# Altium PCB touch_key_v0.1.PcbDoc
Units mil, origin at the board's own origin, x right, y up, seen from the top; angles counter-clockwise.
Board outline 2770.69 x 2770.7 mil, 2 copper layers (Top Layer, Bottom Layer); 60 components, 48 nets, 207 pads, 143 vias.
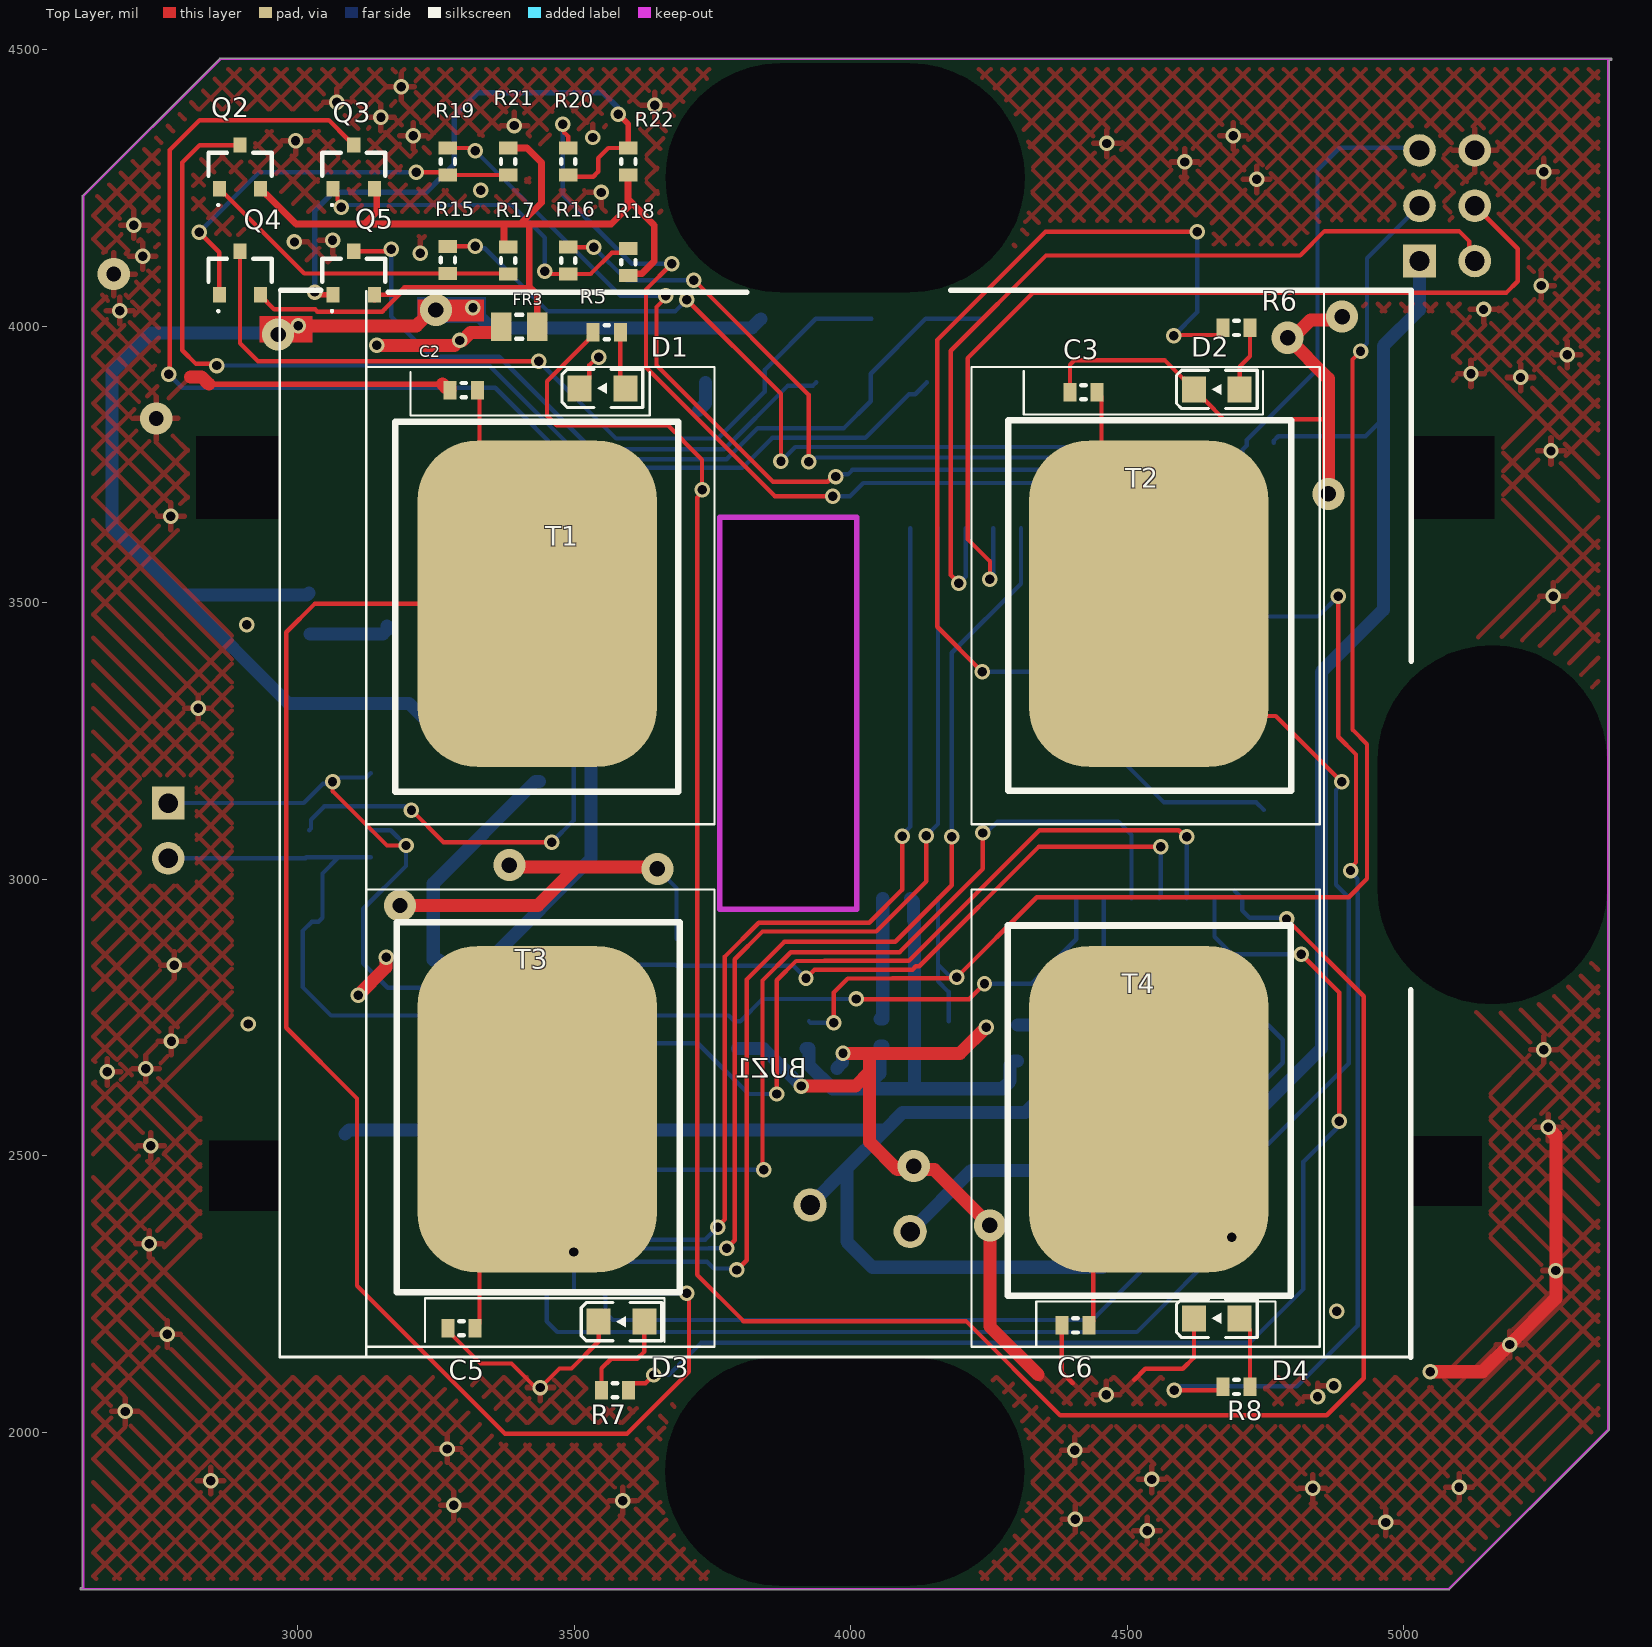
[diagram p0: Top Layer view]
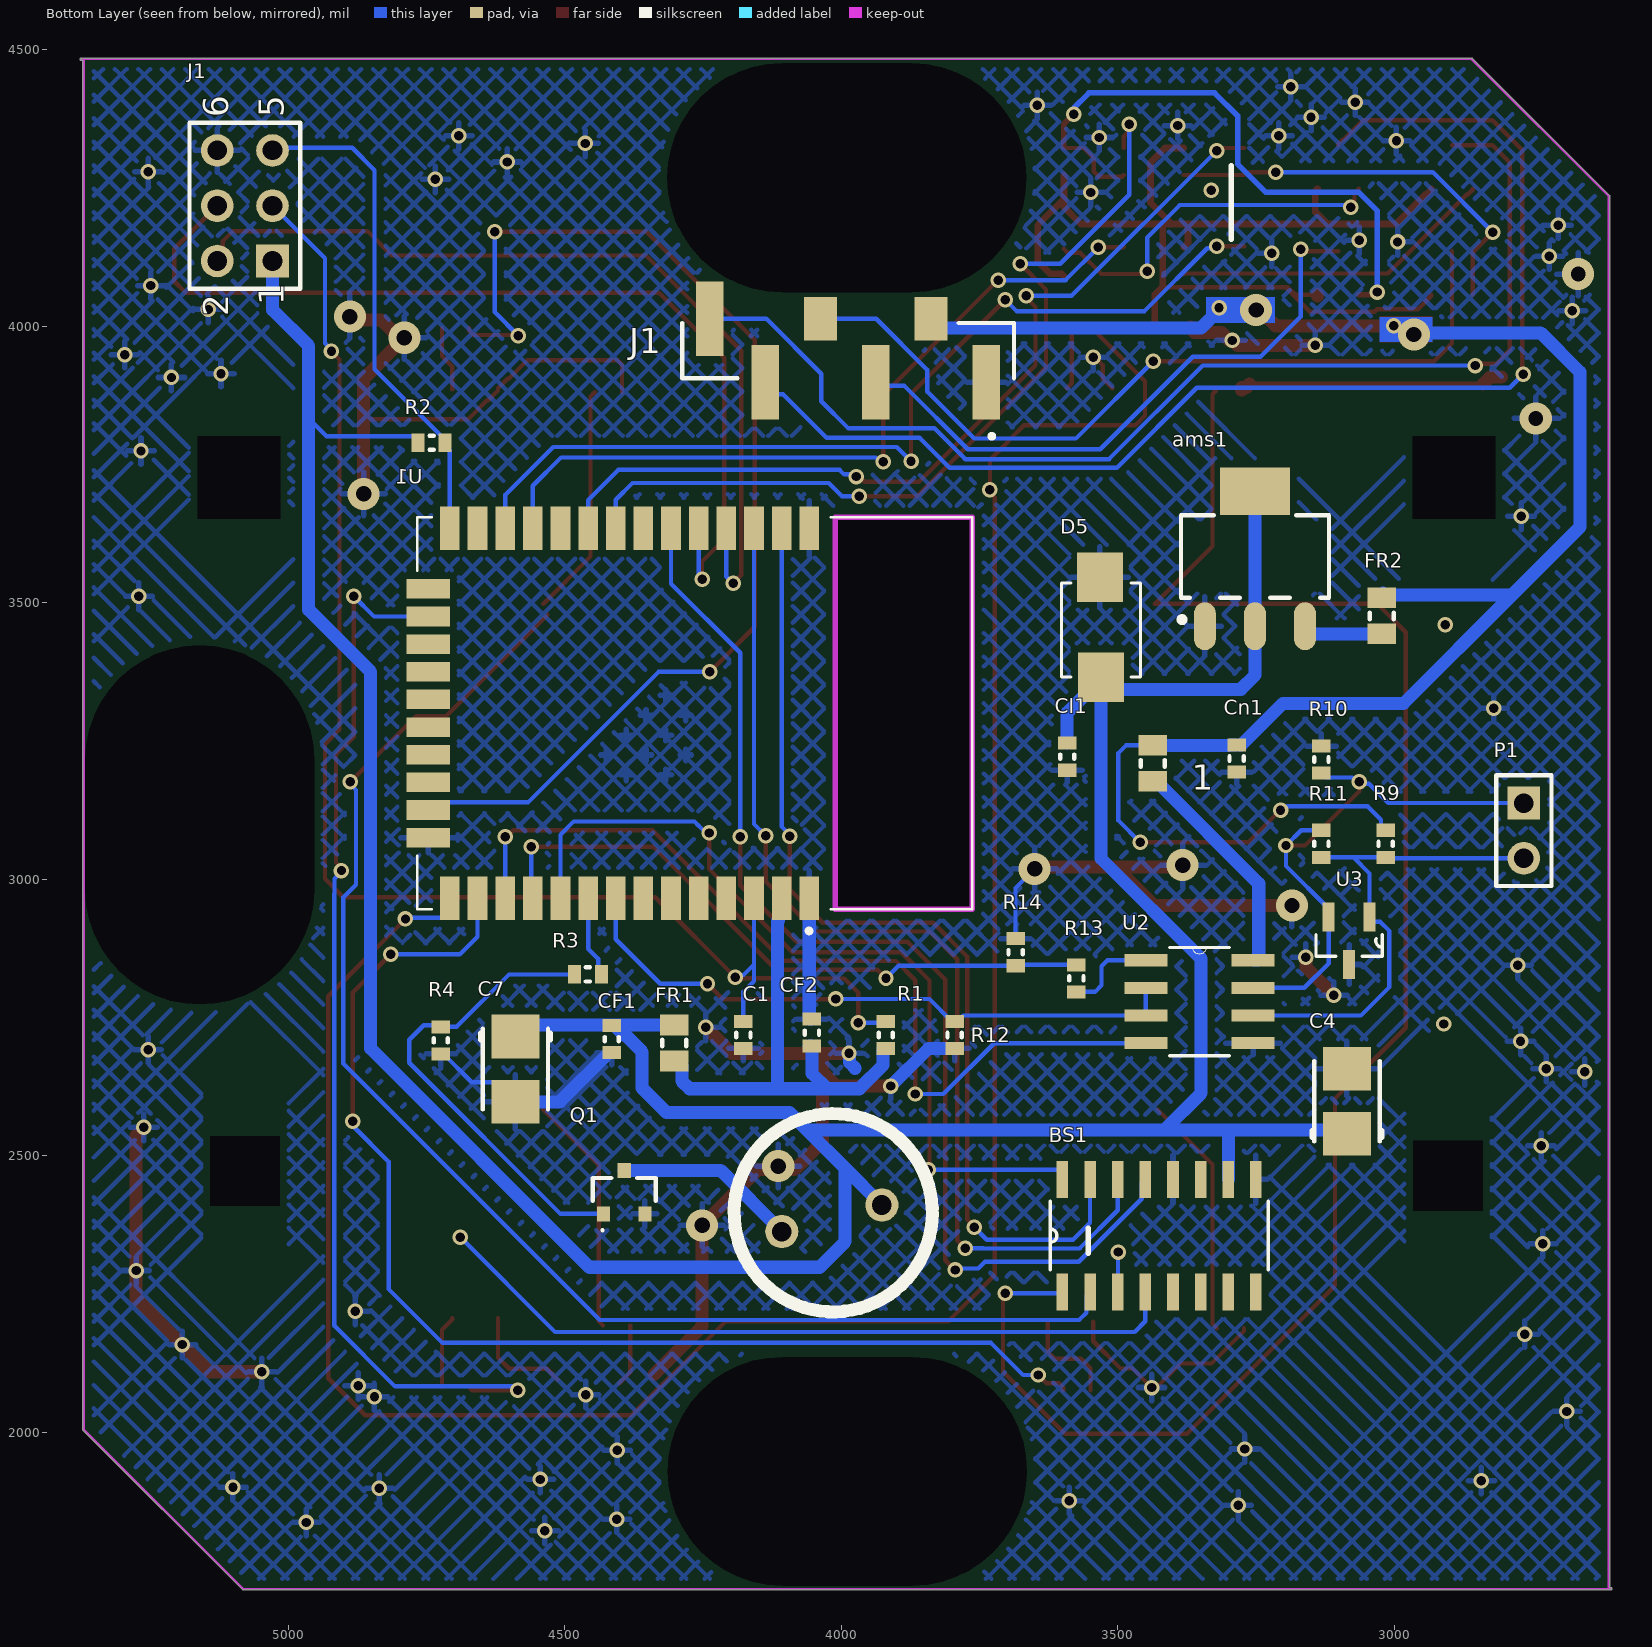
[diagram p1: Bottom Layer view, seen from below]
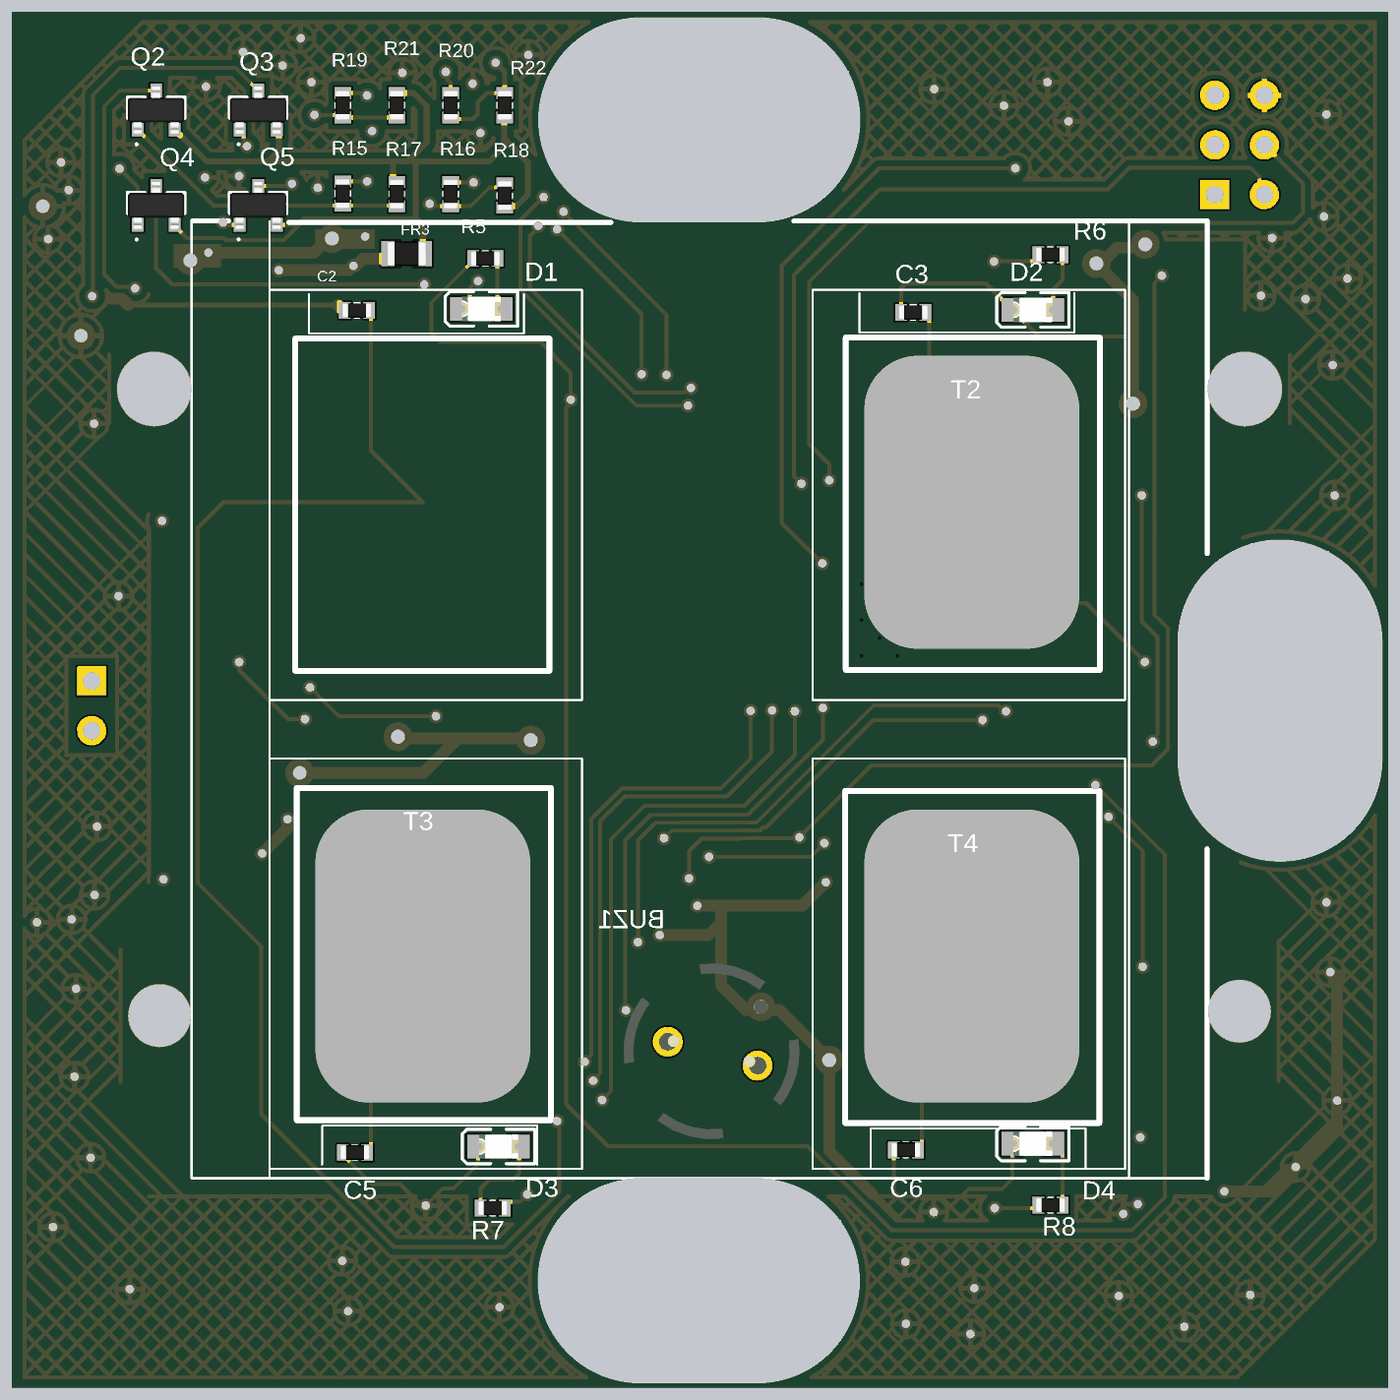
[diagram p2: 3D render of the assembled board from above, using the file's embedded part models]
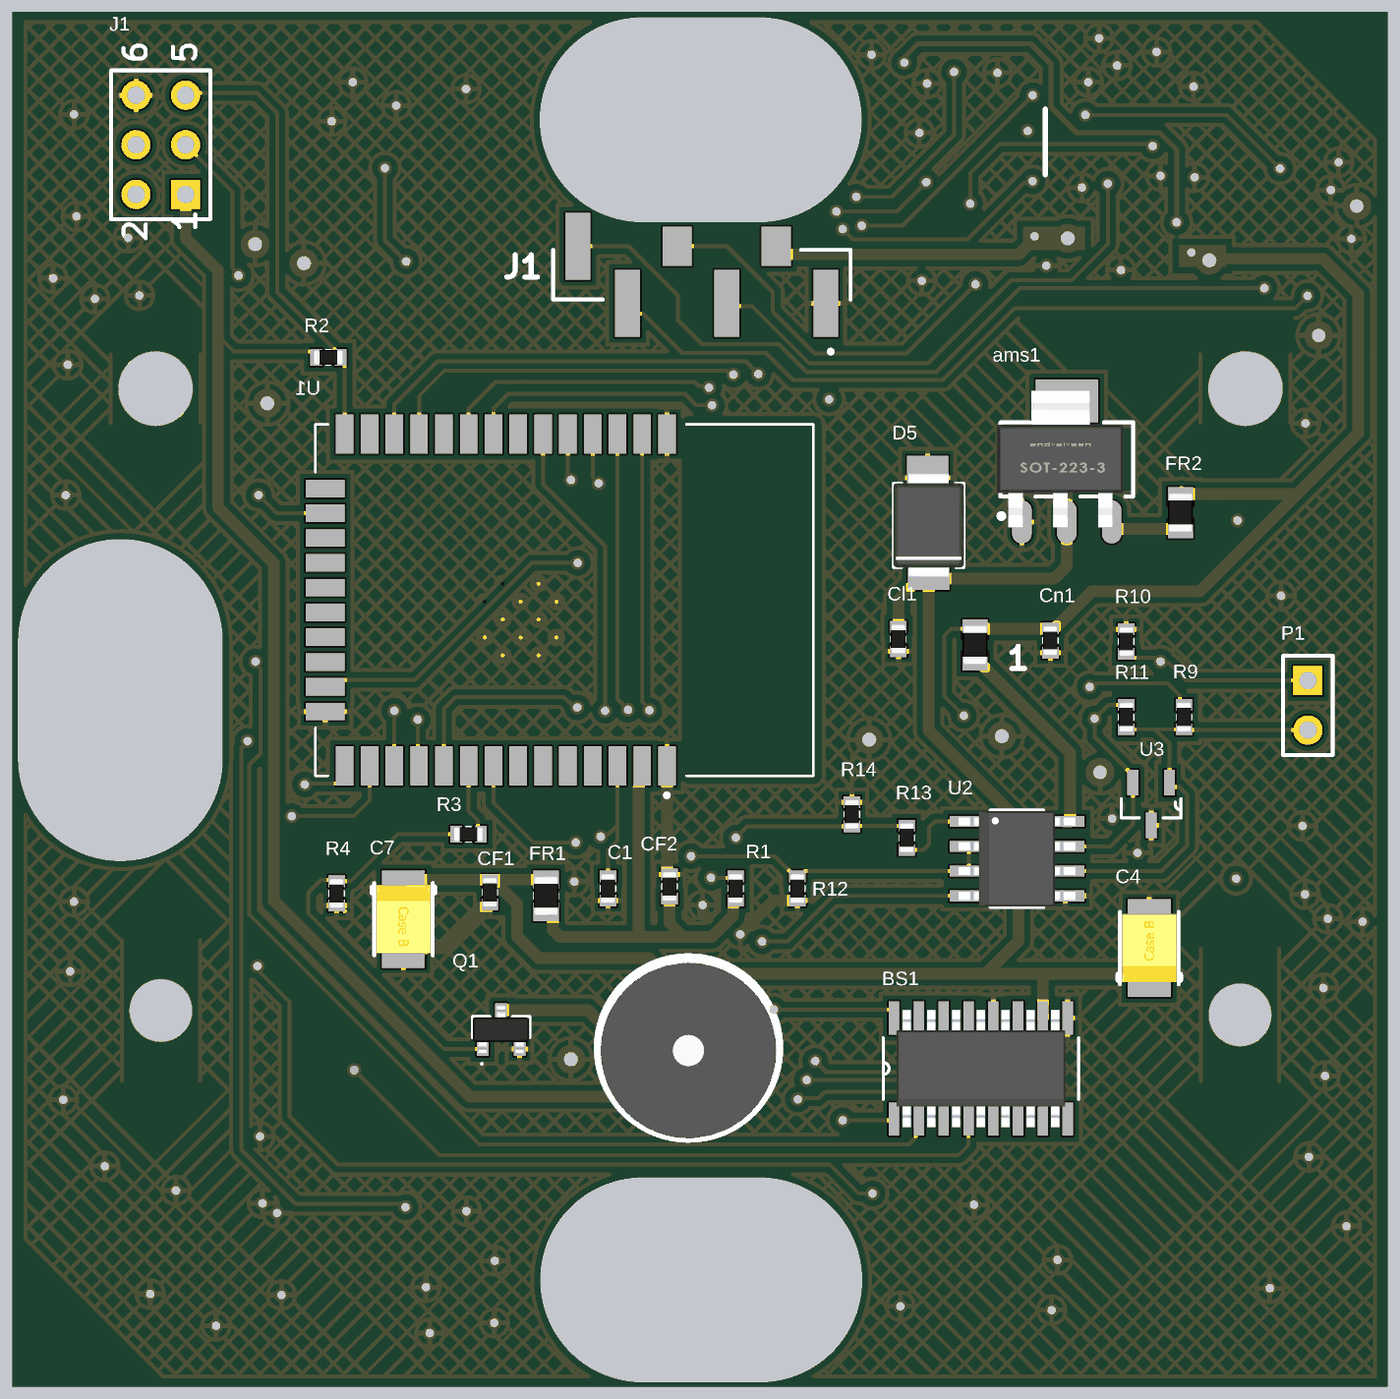
[diagram p3: 3D render of the assembled board from below, using the file's embedded part models]

## Layer stack, top to bottom
Top Solder: solder mask 0.4, Solder Resist, Dk 3.5
Top Layer: signal copper 1.4
Dielectric 1: dielectric 12.6, FR-4, Dk 4.8
Bottom Layer: signal copper 1.4
Bottom Solder: solder mask 0.4, Solder Resist, Dk 3.5

## Board outline
2608.27,1714.55 cw(c2608.27,1716.54) 2608.27,1718.52 2610.22,1718.52 2610.22,4235.24 cw(c2612.2,4235.24) 2610.81,4236.65 2610.8,4236.64 2858.83,4484.67 2858.82,4484.66 cw(c2860.24,4483.27) 2860.24,4485.25 5375,4485.25 cw(c5375,4483.27) 5376.98,4483.27 cw(c5375,4483.27) 5375,4481.28 5372.06,4481.28 5372.06,2004.92 cw(c5370.08,2004.92) 5371.47,2003.51 5371.48,2003.52 5083.1,1715.13 5083.11,1715.14 cw(c5081.69,1716.54) 5081.69,1714.55
cut-out: 4011.22,3654.53 3763.19,3654.53 3763.19,2945.87 4011.22,2945.87

## Design rules (kind name [scope] priority, off if disabled: settings)
Clearance [All] p1: gap=8 ignorepadtopadclearanceinfootprint=FALSE except(12: Arc-Poly Track-Poly SMDPad-Poly THPad-Poly Via-Poly Fill-Poly Poly-Poly)
PolygonConnect [All] p1: connectstyle=Relief reliefconductorwidth=10 reliefentries=4 polygonreliefangle="90 Angle" airgapwidth=10
RoomDefinition U_Touch_pad [InComponentClass('U_Touch_pad')] p1: confinementstyle=ConfineOut formatcopy=TRUE lockcomponents=FALSE outline 10984.25,4602.59 10384.36,4602.59 10384.36,5384.12 10984.25,5384.12
RoomDefinition U_RS485 [InComponentClass('U_RS485')] p2: confinementstyle=ConfineOut formatcopy=TRUE lockcomponents=FALSE outline 10397.64,4228.35 10707.07,4228.35 10707.07,4547.26 10397.64,4547.26
RoomDefinition U_Relay_baias [InComponentClass('U_Relay_baias')] p3: confinementstyle=ConfineOut formatcopy=TRUE lockcomponents=FALSE outline 10391.31,3450.79 10800.2,3450.79 10800.2,4190.98 10391.31,4190.98
RoomDefinition U_power [InComponentClass('U_power')] p4: confinementstyle=ConfineOut formatcopy=TRUE lockcomponents=FALSE outline 10205.63,2912.4 11004.92,2912.4 11004.92,3329.74 10205.63,3329.74
RoomDefinition U_MCU [InComponentClass('U_MCU')] p5: confinementstyle=ConfineOut formatcopy=TRUE lockcomponents=FALSE outline 11225.66,3417.32 12075.79,3417.32 12075.79,4573.88 11225.66,4573.88
RoutingVias [All] p1: holewidth=17 width=28 viastyle="Through Hole" minholewidth=17 minwidth=28 maxholewidth=28 maxwidth=50
SilkToSilkClearance [All] p1: silktosilkclearance=5
SolderMaskExpansion [All] p1: expansion=4 istentingtop=FALSE
Width [All] p1: maxlimit=23.62 minlimit=7.87 preferedwidth=10
29 further rules are at their usual default settings.

## Classes and differential pairs
net class Relay_[1..4]: Relay_1 Relay_2 Relay_3 Relay_4
net class LED_[1..4]: LED_1 LED_2 LED_3 LED_4
component class U_Touch_pad: BS1 C2 C3 C4 C5 C6 D1 D2 D3 D4 R5 R6 R7 R8 T1 T2 T3 T4
component class U_RS485: 1 Cn1 P1 R9 R10 R11 R12 R13 R14 U2 U3
component class U_Relay_baias: FR3 J1 Q2 Q3 Q4 Q5 R15 R16 R17 R18 R19 R20 R21 R22
component class U_power: ams1 C7 Cl1 D5 FR2
component class U_MCU: BUZ1 C1 CF1 CF2 FR1 J1 Q1 R1 R2 R3 R4 U1

## Components (designator, comment, footprint, x,y, rotation, side; value= is the part's Value field where it differs from the comment)
1 "F=1.0 A" SMD_RES_0805 3437.01,3177.17 r90 bottom
ams1 "3V3" SOT223 3251.97,3583.66 r90 bottom
BS1 "BS818-02" SOIC127P600X175-16N 3425.2,2355.32 r90 bottom
BUZ1 "Buzzer" Buzzer_japan 4015.75,2387.8 r0 top locked
C1 "1uF" "RES 0603 (1608X06L)" 4177.17,2693.9 r90 bottom
C2 "3pF" "RES 0603 (1608X06L)" 3275.81,3884.84 r0 top
C3 "3pF" "RES 0603 (1608X06L)" 4396.87,3880.91 r0 top
C4 "100uf 6vT" B 3085.63,2598.43 r90 bottom
C5 "3pF" "RES 0603 (1608X06L)" 3271.87,2187.99 r0 top
C6 "3pF" "RES 0603 (1608X06L)" 4382.11,2192.91 r0 top
C7 "100uf 6vT" B 4589.57,2656.5 r270 bottom
CF1 "Capacitor SMD" "RES 0603 (1608X06L)" 4415.35,2735.24 r270 bottom
CF2 "Capacitor SMD" "RES 0603 (1608X06L)" 4053.15,2698.06 r90 bottom
Cl1 "100nf" "RES 0603 (1608X06L)" 3591.54,3197.07 r90 bottom
Cn1 "100nF" "RES 0603 (1608X06L)" 3285.11,3193.9 r90 bottom
D1 "LED SMD PACKAGE" LED_SMD_0805 3551.18,3887.8 r0 top
D2 "LED SMD PACKAGE" LED_SMD_0805 4662.4,3885.83 r0 top
D3 "LED SMD PACKAGE" LED_SMD_0805 3585.63,2199.8 r0 top
D4 "LED SMD PACKAGE" LED_SMD_0805 4662.4,2205.71 r0 top
D5 "SMBJ3.3" DIOM4336X265N 3530.51,3450.79 r90 bottom
FR1 "Ferrit Bead" "RES 0805 (2012X06L)" 4302.15,2736.22 r270 bottom
FR2 "Ferrit Bead" "RES 0805 (2012X06L)" 3022.64,3508.86 r270 bottom
FR3 "Ferrit Bead" "RES 0805 (2012X06L)" 3368.11,3999.02 r0 top
J1 "TSM-106-01-TM-SV" SAMTEC_TSM-106-01-TM-SV 3987.8,3956.1 r180 bottom
J1 "Header 3X2" HDR2X3 5028.94,4118.11 r90 bottom (schematic designator j1)
P1 "Header 2" HDR1X2 2765.75,3137.8 r270 bottom
Q1 "BC817-25" BC81725215 4392.72,2434.06 r180 bottom
Q2 "BC817-25" BC81725215 2895.67,4288.39 r0 top
Q3 "BC817-25" BC81725215 3101.38,4288.39 r0 top
Q4 "BC817-25" BC81725215 2895.67,4096.46 r0 top
Q5 "BC817-25" BC81725215 3101.38,4096.46 r0 top
R1 "10K" "RES 0603 (1608X06L)" 3919.78,2742.89 r270 bottom
R2 "10K" "RES 0603 (1608X06L)" 4765.53,3789.37 r180 bottom
R3 "10K" "RES 0603 (1608X06L)" 4434.06,2827.76 r0 bottom
R4 "10K" "RES 0603 (1608X06L)" 4724.41,2733.05 r270 bottom
R5 "1k" "RES 0603 (1608X06L)" 3534.45,3989.17 r0 top
R6 "1k" "RES 0603 (1608X06L)" 4673.45,3997.05 r0 top
R7 "1k" "RES 0603 (1608X06L)" 3598.43,2075.79 r180 top
R8 "1k" "RES 0603 (1608X06L)" 4673.45,2081.69 r0 top
R9 "375" "RES 0603 (1608X06L)" 3015.75,3088.58 r270 bottom
R10 "375" "RES 0603 (1608X06L)" 3131.89,3240.92 r270 bottom
R11 "50 ohm" "RES 0603 (1608X06L)" 3131.89,3039.59 r90 bottom
R12 "10K" "RES 0603 (1608X06L)" 3795.28,2742.89 r270 bottom
R13 "5.6k" "RES 0603 (1608X06L)" 3574.8,2796.26 r90 bottom
R14 "10k" "RES 0603 (1608X06L)" 3685.04,2843.5 r90 bottom
R15 "10K" "RES 0603 (1608X06L)" 3271.65,4144.46 r270 top
R16 "10K" "RES 0603 (1608X06L)" 3489.26,4143.7 r270 top
R17 "10K" "RES 0603 (1608X06L)" 3380.46,4094.49 r90 top
R18 "10K" "RES 0603 (1608X06L)" 3598.06,4140.55 r270 top
R19 "10K" "RES 0603 (1608X06L)" 3271.65,4322.64 r270 top
R20 "10K" "RES 0603 (1608X06L)" 3489.26,4322.64 r270 top
R21 "10K" "RES 0603 (1608X06L)" 3380.46,4273.65 r90 top
R22 "10K" "RES 0603 (1608X06L)" 3598.06,4322.64 r270 top
T1 "touch key" Touch_key#1 1522.64,3686.02 r0 top
T2 "touch key" Touch_key#2 4539.37,3498.03 r180 top
T3 "touch key" Touch_key#2 3433.07,2583.66 r180 top
T4 "touch key" Touch_key#2 4539.37,2583.66 r0 top
U1 "ESP32-WROOM-32" MODULE_ESP32-WROOM-32 4265.16,3300.2 r90 bottom locked
U2 "ADM485JRZ" SOIC127P600X175-8N 3352.36,2778.54 r180 bottom
U3 "SM712" SOT95P237X112-3N 3081.69,2888.78 r270 bottom

## Footprints (in the part's own frame and the unit in brackets; to place one, negate y for a bottom-side part, rotate by r counter-clockwise, add the part's x,y. Pads: shape width x height; smd on the part's side, far side on the other; paste and mask are expansions set on the pad)
B [mm]
  rect 2x2.2 smd: 1(-1.5,0) 2(1.5,0)
  silkscreen extent -1.85,-1.6 1.85,1.6, body extent -1.75,-1.4 1.75,1.4, height 1.9
BC81725215 [mm]
  rect 0.6x0.7 smd: 1(-0.95,-1) 2(0.95,-1) 3(0,1)
  silkscreen extent -1.45,-1.8 1.45,0.65, body extent -1.45,-1.2 1.45,1.2, height 0.95
Buzzer_japan [mil]
  round 60 hole 35.43: 1(-89,23) 2(92,-25)
  body extent -218,-213 216,221, height 177
DIOM4336X265N [mm]
  rect 2.28x2.12 smd: A(2.425,0.05) C(-2.165,0)
  silkscreen extent -2.16,-1.81 2.16,1.81, body extent -2.68,-1.81 2.68,1.81, height 2.65
HDR1X2 [mm] "Connector; Header; 2 Position"
  rect 1.5x1.5 hole 0.9: 1(0,0)
  round 1.5 hole 0.9: 2(2.54,0)
  silkscreen extent -1.27,-1.27 3.81,1.27
HDR2X3 [mm] "Connector; Header; 3x2 Position"
  rect 1.5x1.5 hole 0.9: 1(0,0)
  round 1.5 hole 0.9: 2(0,2.54) 3(2.54,0) 4(2.54,2.54) 5(5.08,0) 6(5.08,2.54)
  silkscreen extent -1.27,-1.27 6.35,3.81
LED_SMD_0805 [mm]
  rect 1.1x1.2 smd: 1(-1.05,0) 2(1.05,0)
  silkscreen extent -1.85,-0.88 1.85,0.88, body extent -1,-0.62 1,0.63, height 0.7
MODULE_ESP32-WROOM-32 [mm]
  rect 2x0.9 smd: 1(-8.5,-5.26) 2(-8.5,-3.99) 3(-8.5,-2.72) 4(-8.5,-1.45) 5(-8.5,-0.18) 6(-8.5,1.09) 7(-8.5,2.36) 8(-8.5,3.63) 9(-8.5,4.9) 10(-8.5,6.17) 11(-8.5,7.44) 12(-8.5,8.71) 13(-8.5,9.98) 14(-8.5,11.25) 25(8.5,11.25) 26(8.5,9.98) 27(8.5,8.71) 28(8.5,7.44) 29(8.5,6.17) 30(8.5,4.9) 31(8.5,3.63) 32(8.5,2.36) 33(8.5,1.09) 34(8.5,-0.18) 35(8.5,-1.45) 36(8.5,-2.72) 37(8.5,-3.99) 38(8.5,-5.26)
  rect 0.9x2 smd: 15(-5.715,12.25) 16(-4.445,12.25) 17(-3.175,12.25) 18(-1.905,12.25) 19(-0.635,12.25) 20(0.635,12.25) 21(1.905,12.25) 22(3.175,12.25) 23(4.445,12.25) 24(5.715,12.25)
  round 0 all layers, no hole: 39_10(-1.917,0.405) 39_11(-0.082,0.405) 39_12(-2.835,1.322) 39_13(-1,1.322) 39_14(0.835,1.322) 39_15(-1.917,2.24) 39_16(-0.082,2.24) 39_17(-2.835,3.157) 39_18(-1,3.157) 39_19(0.835,3.157) 39_20(-1.917,4.075) 39_21(-0.082,4.075)
  Keep-Out Layer region: 9,-6.45 -9,-6.45 -9,-12.75 9,-12.75
  Keep-Out Layer region: 9,-6.45 -9,-6.45 -9,-12.75 9,-12.75
  silkscreen extent -10.1,-12.75 9,12.75
"RES 0603 (1608X06L)" [mm] "Chip Resistor, 2-Leads, Body 1.6x0.8mm, IPC High Density _ (0.063W)"
  rect 0.6x0.85 smd: 1(0,0) 2(1.244,0)
  silkscreen extent 0.52,-0.33 0.72,0.33, body extent -0.14,-0.38 1.38,0.38, height 0.45
"RES 0805 (2012X06L)" [mm] "Chip Resistor, 2-Leads, Body 2.0x1.3mm, IPC High Density _ (0.100 W)"
  rect 0.95x1.3 smd: 1(0,0) 2(1.65,0)
  silkscreen extent 0.67,-0.55 0.97,0.55, body extent -0.19,-0.63 1.84,0.64, height 0.6
SAMTEC_TSM-106-01-TM-SV [mm]
  rect 1.27x3.43 smd: 01(6.35,-1.46) 03(1.27,-1.46) 05(-3.81,-1.46) 06(-6.35,1.46)
  rect 1.5x2 smd: 02(3.81,1.46) 04(-1.27,1.46)
  silkscreen extent -7.62,-4.03 7.62,1.27
SMD_RES_0805 [mm] "Chip Resistor, 2-Leads, Body 2.0x1.3mm, IPC High Density _ (0.100 W)"
  rect 0.95x1.3 smd: 1(0,0) 2(1.65,0)
  silkscreen extent 0.67,-0.55 0.97,0.55, body extent -0.19,-0.63 1.84,0.64, height 0.6
SOIC127P600X175-8N [mil]
  rect 78x22 smd: 1(-97,75) 2(-97,25) 3(-97,-25) 4(-97,-75) 5(97,-75) 6(97,-25) 7(97,25) 8(97,75)
  silkscreen extent -54,-98 54,98, body extent -118,-96 118,96, height 69
SOIC127P600X175-16N [mil]
  rect 67x21 smd: 1(-102,175) 2(-102,125) 3(-102,75) 4(-102,25) 5(-102,-25) 6(-102,-75) 7(-102,-125) 8(-102,-175) 9(102,-175) 10(102,-125) 11(102,-75) 12(102,-25) 13(102,25) 14(102,75) 15(102,125) 16(102,175)
  silkscreen extent -62,-197 62,197, body extent -118,-170 118,170, height 69
SOT95P237X112-3N [mil]
  rect 52x22 smd: 1(-43,37) 2(-43,-37) 3(43,0)
  silkscreen extent -11,-60 28,60
SOT223 [mm]
  oval 2.2x1 smd: 1(-3.2,2.3) 2(-3.2,0) 3(-3.2,-2.3)
  rect 2.2x3.2 smd: 4(3,0)
  Top Layer pour cut-out: -1.7,3.556 1.7,3.556 1.7,-3.556 -1.7,-3.556
  silkscreen extent -3.02,-3.4 1.9,3.48, body extent -3.47,-2.93 3.53,3.58, height 1.7
Touch_key#1 [mm]
  rrect50% 11x15 smd mask+0.102: 1(48.525,-4.775)
Touch_key#2 [mm]
  rrect50% 11x15 smd mask+0.102: 1(0,0)

## Part data
1: library part "Fuse SMD1206", "SMD Fuses 1206", Data=16-12-2016, Desc.="SMD Fuses 1206", Designer="Abbas Basereh"
ams1: library part AMS1117-x.x, "x.x Volt, 800mA Low-Dropout Linear Regulator, 4-pin SOT-223", Data=16-12-2016, Designer="Ali Hafizi"
BS1: library part Component_1
BUZ1: library part Buzzer.., "Buzzer/dip/12v", LatestRevisionDate=17-Jul-2002, LatestRevisionNote="Re-released for DXP Platform.", Publisher="Altium Limited"
C1 C2 C3 C5 C6: library part CAP, "Capacitor"
C4 C7: library part T494B, "Cap/Tantalum/SMD/B", PackageDocument=Mar-2001, Code_JEITA=3528-21, ComponentLink1Description="Manufacturer Link", ComponentLink1URL=http://www.kemet.com/, ComponentLink2Description=Datasheet, ComponentLink2URL=http://www.kemet.com/kemet/web/homepage/kechome.nsf/vapubfilesname/F3102TA.pdf/$file/F3102TA.pdf, DatasheetDocument=Mar-2001, LatestRevisionDate=19-Mar-2004, LatestRevisionNote="Silkscreen dimensions re-sized.", PackageReference=B, Published=17-Jul-2002, Publisher="Altium Limited"
Cl1: library part "CAP SMD 0805", "CAP 0805", Data=16-12-2016, Desc.="CAP SMD 0805", Designer="Abbas Basereh"
Cn1: library part "CAP SMD PACKAGE", "TOTAL CAPACITOR SMD PACK", Data=2017-3-10, Desc.="CAP SMD TOTAL PACKAGES", Designer="Abbas Basereh"
D1 D2 D3 D4: "SMD Mono-color Chip LED Waterclear", Forward Voltage="3.2 V", Part Number=150080BS75000, Peak Wavelength="465 nm", Published Date="Jan 2017", Publisher="Ali Hafizi"
D5: library part SMBJ33, Package=None, Availability=Unavailable, MF="{'manufacturer': u'Taiwan Semiconductor'}", MP=SMBJ33, PRICE=None
J1: "CONN HEADER SMD 6POS 2.54MM", Package=None, Availability=Bad, Check_prices=https://www.snapeda.com/parts/TSM-106-01-TM-SV/Samtec/view-part/3383178/?ref=eda, MF=Samtec, MP=TSM-106-01-TM-SV, PRICE=None, Purchase-URL=https://pricing.snapeda.com/search/part/TSM-106-01-TM-SV/?ref=eda, SnapEDA_Link=https://www.snapeda.com/parts/TSM-106-01-TM-SV/Samtec/view-part/3383178/?ref=snap
J1: "Header, 3-Pin, Dual row", LatestRevisionDate=17-Jul-2002, LatestRevisionNote="Re-released for DXP Platform.", Publisher="Altium Limited"
P1: "Header, 2-Pin", LatestRevisionDate=17-Jul-2002, LatestRevisionNote="Re-released for DXP Platform.", Publisher="Altium Limited"
Q1 Q2 Q3 Q4 Q5: "Transistor BJT NPN", Manufacturer_Name=Nexperia, Mouser Part Number=N/A, Datasheet Link=https://assets.nexperia.com/documents/data-sheet/BC817_BC817W_BC337.pdf, Height=1.1mm, Manufacturer_Part_Number=BC817-25, Mouser Price/Stock=https://www.mouser.com/Search/Refine.aspx?Keyword=N%2FA
R1 R2 R5 R6 R7 R8: library part Res1, "Resistor", LatestRevisionDate=17-Jul-2002, LatestRevisionNote="Re-released for DXP Platform.", PackageReference=AXIAL-0.3, Published=8-Jun-2000, Publisher="Altium Limited"
R3 R4 R15 R16 R17 R18 R19 R20 R21 R22: library part Resistor, "Resistor", Power="1/8 W", Tolerance=5%
R9 R10 R11 R12 R13 R14: library part "RES 0805 0.125W", "RES 0805", Data=16-12-2016, Desc.="RES SMD 0805", Designer="Abbas Basereh"
U1: "Bluetooth, WiFi Transceiver Module 2.4GHz ~ 2.5GHz Surface Mount", Package="Module Espressif Systems", Digi-Key_Part_Number=1904-1010-1-ND, Digi-Key_Purchase_URL=https://www.digikey.com/product-detail/en/espressif-systems/ESP32-WROOM-32/1904-1010-1-ND/8544305?utm_source=snapeda&utm_medium=aggregator&utm_campaign=symbol, MF="Espressif Systems", MP=ESP32-WROOM-32, SnapEDA_Link=https://www.snapeda.com/parts/ESP32-WROOM-32/Espressif%20Systems/view-part/2753322/?ref=snap
U2: "EIA RS-485 Transceiver", Package=None, Availability=Unavailable, MF="{'manufacturer': u'Analog Devices'}", MP=ADM485JRZ, PRICE=None
U3: "TVS Diode", Package=None, Availability=Unavailable, MF="{'manufacturer': u'Semtech'}", MP=SM712, PRICE=None

## Free pads (board coordinates)
  round 0 hole 413.39 slot 649.61 at 0 deg unplated: 15(3989.17,1929.13) 15(3990.16,4268.7)
  round 0 hole 413.39 slot 649.61 at 90 deg unplated: 15(5160.43,3098.43)
  round 50 hole 149.61 square: 17(2891.73,3726.38) 17(5089.57,3726.38)
  round 50 hole 125.98 square: 18(2902.56,2463.58) 18(5078.74,2472.44)

## Via types
v1: diameter 28, hole 17, Top Layer to Bottom Layer, tented both sides, 131 vias
v2: diameter 58, hole 28, Top Layer to Bottom Layer, tented both sides, 7 vias
v3: diameter 58, hole 27, Top Layer to Bottom Layer, tented both sides, 3 vias
v4: diameter 57.99, hole 28, Top Layer to Bottom Layer, tented both sides, 2 vias

## Nets (pads, with @x,y where several pads share a name; then routed paths per layer and width w, separated by ;. In a path a pad name is that pad's centre, name@x,y a point inside that pad or via, vN(x,y) a via of type N, cw(c..) or ccw(c..) an arc to the next point about the centre after c; other vN are vias at no path point)
+3.3V: CF2.1 FR1.2 R1.2 U1.2 | length 904
  Bottom Layer w23.62: R1.2 3924.7,2693.9 3924.7,2663.88 3967.52,2621.06 4025.59,2621.06 ; CF2.1@4058.07,2698.06 CF2.1 4053.15,2648.62 4025.59,2621.06 ; U1.2 4113.98,2959.65 4113.98,2925.34 4115.16,2924.15 4115.16,2625.98 ; FR1.2 4295.27,2671.26 4288.38,2664.37 4288.38,2634.9 4274.54,2621.06 4025.59,2621.06
+3V3: ams1.2 ams1.4 BS1.10 BUZ1.1 C4.1 C7.1 CF1.1 Cl1.2 D5.C FR1.1 J1.1 R2.1 | length 6604
  Bottom Layer w7.87: R2.1 4765.53,3793.36 4773.4,3801.23 4931.15,3801.23 4963.58,3833.66
  Bottom Layer w23.62: C4.1 3092.46,2546.2 3416.4,2546.2 ; ams1.4 ams1.2 3251.97,3369.09 3277.56,3343.5 3508.46,3343.5 D5.C D5.C@3530.51,3362.4 ; BS1.10 3300.2,2539.37 ; Cl1.2 3591.54,3301.38 D5.C@3530.51,3362.4 ; BUZ1.1 3993.08,2477.13 ; FR1.1 4568.9,2736.22 C7.1 ; CF1.1 4410.43,2735.24 4393.73,2718.53 4391.08,2718.53 4360.24,2687.69 4360.24,2622.05 4315.94,2577.76 4093.71,2577.76 4062.15,2546.2 ; J1.1 5028.94,4029.92 4963.58,3964.57 4963.58,3833.66 4963.58,3487.2 4851.38,3375 4851.38,2693.9 4455.71,2298.23 4039.32,2298.23 3993.08,2344.46 3993.08,2477.13 ; 3416.4,2546.2 4062.15,2546.2 ; 3416.4,2546.2 3349.41,2613.19 3349.41,2856.3 3530.51,3037.4 D5.C@3530.51,3362.4 ; 3993.08,2477.13 4062.15,2546.2
+5V: 1.2 Cn1.2 FR2.1 J1.02 R9.1 | length 3349
  Top Layer w7.87: v1(3205.71,3125) 3263.78,3066.93 v1(3459.65,3066.93)
  Top Layer w23.62: v1(3000.98,4000.98) 3214.51,4000.98 3228.35,4014.82 3228.35,4020.67 3237.2,4029.53 v4(3250,4029.53)
  Bottom Layer w7.87: R9.1@3020.67,3088.58 3023.93,3091.84 3023.93,3107.59 3048.23,3131.89 3193.37,3131.89 3200.26,3125 v1(3205.71,3125) ; 1.2 3485.24,3242.13 3499.02,3228.35 3499.02,3106.3 v1(3459.65,3066.93)
  Bottom Layer w23.62: v4(2964.57,3985.24) 2969.98,3985.24 v4@2978.84,3994.09 ; v4@2969.98,3994.09 2964.07,3988.19 2735.24,3988.19 2664.37,3917.32 2664.37,3636.81 2787.4,3513.78 ; FR2.1@3020.67,3517.72 3016.73,3513.78 2787.4,3513.78 ; Cn1.2@3280.18,3242.89 3276.57,3242.89 3201.55,3317.91 2983.27,3317.91 2787.4,3513.78 ; Cn1.2@3285.87,3242.89 3296.95,3242.89 3297.71,3242.13 1.2 ; v1(3316.93,4033.46) 3316.93,4029.53 3349.36,3997.1 3821.31,3997.1 J1.02
A: P1.2 R9.2 R11.1 U2.6 U3.1 | length 903.2
  Bottom Layer w7.87: P1.2 3013.95,3037.8 R9.2 3073.82,3039.59 ; R11.1 3073.82,3039.59 ; U2.6 3060.43,2753.54 3008.86,2805.12 3008.86,2906.5 3025.59,2923.23 3037.63,2923.23 3044.69,2930.29 U3.1 3044.69,3010.46 3073.82,3039.59
B: P1.1 R10.2 R11.2 U2.7 U3.2 | length 1054.5
  Top Layer w7.87: v1(3062.99,3176.18) 3062.99,3159.45 3161.42,3061.02 v1(3195.87,3061.02)
  Bottom Layer w7.87: P1.1 3010.83,3137.8 3045.73,3172.69 3059.5,3172.69 v1(3062.99,3176.18) 3068.44,3176.18 3076.31,3184.06 3124.02,3184.06 R10.2 ; R11.2 3168.31,3088.58 v1(3195.87,3061.02) 3195.87,3023.95 3118.69,2946.78 U3.2 3118.69,2847.84 3162.99,2803.54 U2.7
B0: BS1.13 U1.33 | length 2100.6
  Top Layer w7.87: v1(3794.29,2293.31) 3812.01,2311.02 3812.01,2818.65 3880.17,2886.81 4080.71,2886.81 4183.07,2989.17 v1(4183.07,3076.77)
  Bottom Layer w7.87: BS1.13 3456.76,2450.75 3456.76,2422.18 3570.87,2308.07 3740.16,2308.07 3752.3,2295.93 3791.67,2295.93 v1(3794.29,2293.31) ; v1(4183.07,3076.77) 4183.07,3409.45 4308.07,3534.45 U1.33
B1: BS1.14 U1.36 | length 1942
  Top Layer w7.87: v1(3776.24,2332.34) 3776.24,2332.9 3790.35,2347.02 3790.35,2855.31 3840.55,2905.51 4046.26,2905.51 4136.81,2996.06 v1(4136.81,3078.74)
  Bottom Layer w7.87: BS1.14 3500.2,2401.19 3569.17,2332.22 3743.45,2332.22 3743.57,2332.34 v1(3776.24,2332.34) ; v1(4136.81,3078.74) 4158.07,3100 U1.36
B2: BS1.15 U1.37 | length 1835.4
  Top Layer w7.87: v1(3759.32,2370.54) 3759.32,2371.9 3772.64,2385.22 3772.64,2860.24 3833.79,2921.39 4033.59,2921.39 4093.5,2981.3 v1(4093.5,3077.76)
  Bottom Layer w7.87: BS1.15 3550.2,2378.86 3580.96,2348.09 3736.87,2348.09 v1(3759.32,2370.54) ; v1(4093.5,3077.76) 4093.5,3080.71 4108.07,3095.28 U1.37
buzer: R3.1 U1.9 | length 147.7
  Bottom Layer w7.87: R3.1 4439.96,2833.66 4439.96,2856.3 4458.07,2874.41 U1.9
Din: R12.1 U1.8 U2.2 U2.3 | length 1149.2
  Top Layer w7.87: v1(4009.84,2783.46) 4010.32,2782.99 4214.09,2782.99 v1(4242.13,2811.02)
  Bottom Layer w7.87: U2.2 U2.3 3779.7,2753.54 3790.35,2742.89 3800.2,2742.89 3840.77,2783.46 v1(4009.84,2783.46) ; v1(4242.13,2811.02) 4327.76,2811.02 4408.07,2891.34 U1.8
FLASH: J1.5 R2.2 U1.25 | length 907.3
  Bottom Layer w7.87: U1.25 4708.07,3775.98 4716.54,3784.45 R2.2 4716.54,3794.29 4844.49,3922.24 4844.49,4282.48 4884.84,4322.83 5024.21,4322.83 J1.5
GND: ams1.1 BS1.9 BS1.12 C1.1 C2.1 C3.1 C4.2 C5.1 C6.1 C7.2 CF1.2 CF2.2 Cl1.1 Cn1.1 D1.1 D2.1 D3.1 D4.1 D5.A FR3.1 J1.01 J1.6 Q1.2 R4.2 R10.1 R12.2 R14.2 U1.1 U1.15 U1.38 U1.39_10 U1.39_11 U1.39_12 U1.39_13 U1.39_14 U1.39_15 U1.39_16 U1.39_17 U1.39_18 U1.39_19 U1.39_20 U1.39_21 U2.5 U3.3 | length 5935.9
  Top Layer w7.87: C5.1 3271.87,2183.07 3330.71,2124.24 3386.59,2124.24 3430.12,2080.71 v1(3438.98,2080.71) 3473.43,2115.16 3495.08,2115.16 3544.29,2164.37 D3.1 ; D1.1 3527.56,3905.51 3527.56,3930.12 3541.34,3943.9 v1(3544.29,3943.9) ; C6.1 4382.11,2108.05 4401.57,2088.58 ; C3.1 4396.87,3930.34 4405.51,3938.98 4567.91,3938.98 4601.38,3905.51 4603.35,3905.51 4621.06,3887.8 D2.1 4621.06,3883.86 4638.78,3866.14 4640.75,3866.14 4675.2,3831.69 4864.17,3831.69 ; 4512.8,2094.49 4532.97,2114.67 4600.89,2114.67 4621.06,2134.84 D4.1
  Top Layer w10: 2839.34,3895.32 3261.97,3895.32
  Top Layer w23.62: 2806.11,3908.34 2826.33,3908.34 2839.34,3895.32 ; v1(3109.25,2790.35) 3159.6,2840.7 3159.6,2858.41 v1(3160.43,2859.25) ; v1(3142.72,3965.55) 3283.26,3965.55 3292.12,3974.41 v1(3293.31,3974.41) 3298.23,3974.41 3312.87,3989.05 3361.22,3989.05 3368.11,3995.94 FR3.1 ; v3(3185.04,2952.76) 3434.55,2952.76 3503.94,3022.15 ; 3261.97,3895.32 3267.53,3889.76 3275.81,3889.76 C2.1 ; v2(3382.87,3025.59) 3386.32,3022.15 3503.94,3022.15 ; v2(3650.59,3018.7) 3647.15,3022.15 3503.94,3022.15 ; v1(3910.43,2625.98) 4008.86,2625.98 4034.45,2651.57 ; v1(3986.22,2685.04) 4034.45,2685.04 ; v1(4245.08,2732.28) 4197.83,2685.04 4034.45,2685.04 ; 4338.64,2104.39 4251.97,2191.07 v2(4251.97,2374.02) 4151.26,2474.72 4120.75,2474.72 v2(4114.17,2481.3) 4107.6,2474.72 4084.47,2474.72 4034.45,2524.74 4034.45,2651.57 ; v2(4864.17,3696.85) 4864.17,3831.69 4864.17,3905.51 v2(4790.35,3979.33) 4799.66,3979.33 4831.46,4011.14 4882.2,4011.14 v2(4888.78,4017.72) ; v1(5048.23,2109.25) 5142.72,2109.25 v1(5191.93,2158.46) 5275.59,2242.13 v1(5275.59,2292.32) 5275.59,2536.22 5261.81,2550 v1(5261.81,2551.18) ; 4034.45,2651.57 4034.45,2685.04
  Bottom Layer w7.87: v2(3650.59,3018.7) 3685.04,2984.25 R14.2 ; C7.2 4625,2632.87 4668.31,2632.87 4719.49,2684.06 R4.2
  Bottom Layer w23.62: J1.01@3724.61,3847.44 3737.8,3860.63 J1.01 ; R12.2 3842.52,2693.9 v1(3910.43,2625.98) v1@3911.62,2625.98 ; 3975.12,2658.19 3985.38,2668.45 3985.38,2684.2 v1(3986.22,2685.04) ; CF2.2 4058.07,2747.05 U1.1 ; CF1.2 4420.28,2686.24 4509.08,2597.44 C7.2
  other v1: 4536.42,1821.85 4967.52,1836.61 4406.5,1842.52 3282.48,1868.11 3587.6,1875.98 4835.63,1898.62 5100.39,1900.59 2842.52,1912.4 4544.29,1914.37 4405.51,1967.52 3270.67,1969.49 2687.99,2037.4 4844.49,2063.98 4462.6,2067.91 4874.02,2083.66 2763.78,2177.17 4878.94,2218.5 2731.3,2340.55 2734.25,2517.72 2655.51,2651.57 2725.39,2657.48 5253.94,2691.93 2771.65,2706.69 2776.57,2844.49 2819.88,3309.06 5270.67,3511.81 2770.67,3656.5 5266.73,3774.61 5211.61,3907.48 5122.05,3914.37 5296.26,3948.82 2678.15,4028.54 5144.69,4030.51 5249.02,4073.82 2719.49,4126.97 3221.46,4131.89 2994.09,4152.56 3062.99,4155.51 2703.74,4183.07 3549.21,4242.13 4734.25,4265.75 5253.94,4279.53 4604.33,4297.24 4463.58,4330.71 2996.06,4335.63 3533.46,4341.54 3208.66,4344.49 4691.93,4344.49 3391.73,4363.19 3150.59,4377.95 3645.67,4399.61 3070.87,4405.51 3187.01,4433.07
  other v3: 2744.09,3833.66 2667.32,4094.49
GND_1: FR3.2 Q2.2 Q3.2 Q4.2 Q5.2 R17.2 R18.2 R21.2 R22.2 | length 2049.2
  Top Layer w7.87: Q4.2 2933.07,4055.12 2957.55,4030.64 3031.52,4030.64 3035.58,4026.57 3152.87,4026.57 3157.48,4031.19 3196.75,4070.46 ; Q5.2 3179.13,4057.09 3192.51,4070.46 3196.75,4070.46 ; 3425.96,4064.81 3420.31,4070.46 3196.75,4070.46
  Top Layer w12: Q2.2 2933.07,4247.05 2940.95,4239.17 2942.91,4239.17 2997.05,4185.04 3121.06,4185.04 ; Q3.2 3142.72,4245.08 3142.72,4206.69 3121.06,4185.04 ; R17.2 3373.03,4150.9 3373.03,4180.43 3368.42,4185.04 ; R21.2 3414.57,4322.64 3440.94,4296.26 3440.94,4223.43 3402.56,4185.04 ; 3420.31,4070.46 3418.85,4071.92 3418.85,4184.6 3419.29,4185.04 ; 3425.96,4064.81 3433.07,4057.7 FR3.2 ; R18.2 3601.31,4094.81 3621.99,4094.81 3644.68,4117.51 3644.68,4183.07 3597.44,4230.31 ; R22.2 3597.44,4273.03 3597.44,4230.31 ; 3121.06,4185.04 3368.42,4185.04 ; 3368.42,4185.04 3402.56,4185.04 ; 3402.56,4185.04 3419.29,4185.04 ; 3419.29,4185.04 3566.93,4185.04 3597.44,4215.55 3597.44,4230.31
  Top Layer w23.62: Q5.2@3138.78,4055.12 Q5.2
intrupt_touch: BS1.16 U1.10 | length 1548.4
  Top Layer w7.87: v1(3842.52,2474.41) 3840.55,2476.38 3840.55,2816.93 3891.73,2868.11 3946.05,2868.11 3946.18,2868.24 4088.71,2868.24 4239.17,3018.7 v1(4239.17,3083.66)
  Bottom Layer w7.87: BS1.16 3600.2,2467.85 3606.76,2474.41 v1(3842.52,2474.41) ; v1(4239.17,3083.66) 4244.62,3083.66 4257.41,3096.46 4257.87,3096.46 4265.75,3104.33 4484.25,3104.33 4508.07,3080.51 U1.10
k1: BS1.1 C2.2 T1.1 | length 3296.5
  Top Layer w7.87: C2.2 3322.83,3882.87 3328.74,3876.97 T1.1@3328.74,3602.36 ; v1(3703.74,2250.98) 3707.59,2247.13 3707.59,2236.39 3707.68,2236.31 3707.68,2109.25 3595.47,1997.05 3375,1997.05 3107.28,2264.76 3107.28,2603.35 2979.33,2731.3 2979.33,3446.85 3030.51,3498.03 T1.1 ; T1.1@3328.74,3602.36 T1.1 ; T1.1@3328.74,3602.36 T1.1
  Bottom Layer w7.87: BS1.1 3602.53,2250.98 v1(3703.74,2250.98)
k2: BS1.2 C3.2 T2.1 | length 3008.4
  Top Layer w7.87: C3.2 4453.74,3873.03 4453.74,3583.66 T2.1 ; T2.1@4531.5,3478.35 4714.57,3295.28 4768.92,3295.28 v1(4888.02,3176.18)
  Bottom Layer w7.87: BS1.2 3556.76,2246.75 3556.76,2216.05 3570.06,2202.76 4437.01,2202.76 4901.04,2666.79 4901.04,2967.07 4877.95,2990.16 4877.95,3161.51 4888.02,3171.57 v1(4888.02,3176.18)
K3: BS1.3 C5.2 T3.1 | length 513.1
  Top Layer w7.87: C5.2 3328.74,2195.87 3328.74,2484.25 T3.1@3428.15,2583.66
  Bottom Layer w7.87: v1(3499.02,2325.79) 3499.61,2325.2 3499.61,2253.91 BS1.3
K4: BS1.4 C6.2 T4.1 | length 1806.2
  Top Layer w7.87: C6.2 4438.98,2200.79 4438.98,2483.27 T4.1
  Bottom Layer w7.87: BS1.4 3450.2,2200.48 3469.57,2181.1 4517.72,2181.1 v1(4688.98,2352.36)
LED_1: R5.1 U1.14 | length 4332.6
  Top Layer w7.87: R5.1 3534.45,3984.25 3450.79,3900.59 3450.79,3838.58 3468.5,3820.87 3670.28,3820.87 3697.83,3793.31 3697.83,3792.32 3731.3,3758.86 3731.3,3699.28 3722.44,3690.42 3722.44,2284.45 3806.1,2200.79 4208.66,2200.79 4378.94,2030.51 4861.22,2030.51 4928.15,2097.44 4928.15,2788.39 v1(4788.39,2928.15)
  Bottom Layer w7.87: U1.14@4694.29,2979.33 U1.14 4708.07,2943.9 4721.85,2930.12 4786.42,2930.12 v1(4788.39,2928.15)
  other v1: 3731.3,3704.72
LED_2: R6.1 U1.16 | length 2102.3
  Top Layer w7.87: v1(4238.19,3375) 4156.5,3456.69 4156.5,3975.39 4352.36,4171.26 v1(4626.97,4171.26) ; v1(4584.23,3983.12) 4585.36,3984.25 4665.57,3984.25 4673.45,3992.13 R6.1
  Bottom Layer w7.87: v1(4238.19,3375) 4330.84,3375 4566.86,3138.98 4733.66,3138.98 U1.16 ; v1(4584.23,3983.12) 4626.97,4025.86 v1(4626.97,4171.26)
LED_3: R7.1 U1.13 | length 2200.1
  Top Layer w7.87: R7.1 3598.43,2080.71 3606.3,2088.58 3628.94,2088.58 v1(3643.7,2103.35) ; v1(4814.96,2864.17) 4883.86,2795.28 v1(4883.86,2562.01)
  Bottom Layer w7.87: v1(3643.7,2103.35) 3671.26,2103.35 3729.33,2161.42 4721.46,2161.42 4818.9,2258.86 4818.9,2489.17 4882.87,2553.15 v1@4882.87,2562.99 ; U1.13 4658.07,2896.06 4689.96,2864.17 v1(4814.96,2864.17)
LED_4: R8.1 U1.23 | length 1961.3
  Top Layer w7.87: v1(4585.63,2075.79) 4667.54,2075.79 R8.1 ; v1(4881.76,3511.81) 4881.89,3511.68 4881.89,3257.69 4913.95,3225.62 4913.95,3030.42 4904.18,3020.65 v1(4904.18,3015.75)
  Bottom Layer w7.87: v1(4585.63,2075.79) 4592.52,2082.68 4807.09,2082.68 4916.91,2192.5 4916.91,2973.65 4916.74,2973.82 4916.74,3001.07 4904.18,3013.63 v1(4904.18,3015.75) ; U1.23 4845.15,3475.2 v1(4881.76,3511.81)
Net1_1: 1.1 U2.8 | length 417
  Bottom Layer w23.62: U2.8 3245.89,2853.54 3245.08,2854.35 3245.08,2992.13 3430.12,3177.17 1.1
Netams1_3: ams1.3 FR2.2 | length 148.3
  Bottom Layer w23.62: FR2.2 3154.14,3443.9 3161.42,3451.17 ams1.3
NetBUZ1_-: BUZ1.2 Q1.3 | length 330.8
  Bottom Layer w23.62: BUZ1.2 4218.38,2473.43 Q1.3
NetD1_2: D1.2 R5.2 | length 105.1
  Top Layer w7.87: R5.2 3583.44,3896.87 D1.2
NetD2_2: D2.2 R6.2 | length 119
  Top Layer w7.87: D2.2 4703.74,3927.17 4722.44,3945.87 R6.2
NetD3_2: D3.2 R7.2 | length 183.8
  Top Layer w7.87: R7.2 3549.43,2115.38 3566.93,2132.87 3614.17,2132.87 3626.97,2145.67 D3.2
NetD4_2: D4.2 R8.2 | length 131.8
  Top Layer w7.87: D4.2 4703.74,2203.74 4722.44,2185.04 R8.2
NetQ1_1: Q1.1 R3.2 R4.1 | length 855.8
  Bottom Layer w7.87: Q1.1 4507.87,2394.68 4781.48,2668.29 4781.48,2709.66 4755.23,2735.91 4727.27,2735.91 R4.1 4695.87,2733.05 4601.16,2827.76 R3.2
NetQ2_1: Q2.1 R15.2 R17.1 | length 587.3
  Top Layer w7.87: Q2.1 2858.27,4247.05 2866.14,4239.17 2868.11,4239.17 3011.81,4095.47 R15.2 3379.47,4095.47 R17.1
NetQ3_1: Q3.1 R16.2 R18.1 | length 660.4
  Top Layer w7.87: Q3.1 3071.85,4241.14 3071.85,4227.89 3078.74,4221 v1(3078.74,4215.55) ; v1@3451.46,4094.71 R16.2 3529.75,4094.71 3567.91,4132.87 3590.38,4132.87 R18.1
  Bottom Layer w7.87: v1(3078.74,4215.55) 3082.68,4219.49 3387.8,4219.49 3446.85,4160.43 v1(3446.85,4099.41)
NetQ4_1: Q4.1 R19.2 R21.1 | length 733.8
  Top Layer w7.87: v1(2821.85,4170.28) 2858.27,4133.86 Q4.1 ; v1(3214.57,4278.54) 3266.76,4278.54 R19.2 R21.1
  Bottom Layer w7.87: v1(2821.85,4170.28) 2930.12,4278.54 v1(3214.57,4278.54)
NetQ5_1: Q5.1 R20.2 R22.1 | length 1103
  Top Layer w7.87: R20.2 3492.23,4270.67 3534.45,4270.67 3543.31,4279.53 3543.31,4304.13 3561.81,4322.64 R22.1@3593.14,4322.64
  Top Layer w10: v1(3030.51,4062.01) 3035.43,4057.09 Q5.1 ; v1(3579.72,4383.86) 3598.06,4365.52 R22.1
  Bottom Layer w10: v1(3030.51,4062.01) 3030.51,4208.66 3064.66,4242.81 3232.59,4242.81 3283.46,4293.69 3283.46,4380.91 3324.8,4422.24 3552.17,4422.24 3579.72,4394.69 v1(3579.72,4383.86)
OUT1: J1.06 Q2.3 | length 2119.2
  Top Layer w7.87: v1(2853.35,3929.13) 2850.39,3932.09 2815.94,3932.09 2791.34,3956.69 2791.34,4296.26 2822.83,4327.76 Q2.3
  Bottom Layer w7.87: v1(2853.35,3929.13) 3346.46,3929.13 3515.75,3759.84 3775.84,3759.84 3777.68,3761.69 3777.86,3761.69 3832.12,3815.94 3987.83,3815.94 4036.42,3864.53 4036.42,3914.37 4135.63,4013.58 J1.06
OUT2: J1.05 Q3.3 | length 2286.8
  Top Layer w7.87: v1(2766.73,3913.39) 2768.7,3915.35 2768.7,4318.9 2822.83,4373.03 3056.1,4373.03 3091.54,4337.6 3093.5,4337.6 3101.38,4329.72 Q3.3
  Bottom Layer w7.87: v1(2766.73,3913.39) 2791.34,3888.78 3357.28,3888.78 3502.09,3743.97 3804.01,3743.97 3858.27,3798.23 4026.57,3798.23 4105.6,3877.25 4116.73,3877.25 4137.8,3898.31 J1.05
OUT3: J1.04 Q4.3 | length 1492.5
  Top Layer w7.87: Q4.3 2895.67,3969.49 2928.15,3937.01 v1(3436.02,3937.01)
  Bottom Layer w7.87: v1(3436.02,3937.01) 3575.79,3797.24 3759.84,3797.24 3844.49,3881.89 3844.49,3921.26 3936.81,4013.58 J1.04
OUT4: J1.03 Q5.3 | length 1109.7
  Top Layer w7.87: Q5.3 3165.35,4135.83 v1(3169.29,4139.76)
  Bottom Layer w7.87: v1(3169.29,4139.76) 3169.29,4017.72 3242,3945.01 3364.41,3945.01 3531.86,3777.56 3771.29,3777.56 3886.53,3892.8 3931.97,3892.8 J1.03
Relay_1: R15.1 U1.27 | length 1693.1
  Top Layer w7.87: R15.1 3271.87,4144.69 v1(3320.87,4144.69) ; v1(3703.74,4048.23) 3874.02,3877.95 v1(3874.02,3755.91)
  Bottom Layer w7.87: v1(3320.87,4144.69) 3324.35,4141.2 3338.13,4141.2 3451.77,4027.56 3683.07,4027.56 v1(3703.74,4048.23) ; v1(3874.02,3755.91) 3899.96,3781.85 4521.3,3781.85 4608.07,3695.08 U1.27
Relay_2: R16.1 U1.28 | length 1402
  Top Layer w7.87: R16.1 3490.24,4142.72 v1(3535.43,4142.72) ; v1(3716.54,4083.66) 3924.21,3875.98 v1(3924.21,3754.92)
  Bottom Layer w7.87: v1(3535.43,4142.72) 3594.49,4083.66 v1(3716.54,4083.66) ; v1(3924.21,3754.92) 3929.66,3754.92 3937.53,3762.8 4506.89,3762.8 4558.07,3711.61 U1.28
Relay_3: R19.1 U1.30 | length 1615.7
  Top Layer w7.87: R19.1 3316.14,4322.64 v1(3320.87,4317.91) ; v1(3665.35,4055.12) 3665.35,4051.46 3648.93,4035.04 3648.93,3929.44 3859.6,3718.77 3958.75,3718.77 3968.32,3728.35 v1(3973.43,3728.35)
  Bottom Layer w7.87: v1(3320.87,4317.91) 3583.66,4055.12 v1(3665.35,4055.12) ; v1(3973.43,3728.35) 3977.28,3732.2 3995.08,3732.2 4003.17,3740.29 4403.41,3740.29 4458.07,3685.63 U1.30
Relay_4: R20.1 U1.31 | length 1561.5
  Top Layer w7.87: 3482.28,4350.39 3489.26,4343.42 R20.1 ; v1(3676.4,4113.19) 3629.92,4066.71 3629.92,3926 3863.09,3692.84 v1(3967.51,3692.84)
  Bottom Layer w7.87: v1(3479.33,4365.16) 3479.33,4238.19 3604.33,4113.19 v1(3676.4,4113.19) ; v1(3967.51,3692.84) 3998.94,3692.84 4022.64,3716.54 4377.9,3716.54 4408.07,3686.36 U1.31
RST: C1.2 J1.3 R1.1 U1.3 | length 2703.1
  Top Layer w7.87: v1(3969.49,2740.16) 3969.49,2795.28 3994.7,2820.49 4075.08,2820.49 4075.2,2820.61 4189.71,2820.61 4336.61,2967.52 4900.9,2967.52 4934.06,3000.68 4934.06,3244.22 4907.7,3270.57 4907.7,3940.05 4922.24,3954.59 v1(4922.24,3954.72)
  Bottom Layer w7.87: R1.1@3924.7,2742.89 3927.43,2740.16 v1(3969.49,2740.16) ; U1.3 4158.07,2845.6 ; C1.2 4177.17,2796.26 4158.07,2815.35 4158.07,2845.6 ; v1(4191.93,2822.83) 4188.08,2826.69 4176.99,2826.69 4158.07,2845.6 ; v1(4922.24,3954.72) 4922.24,3957.59 4934.06,3969.4 4934.06,4123.23 J1.3
RX: R13.2 R14.1 U1.11 | length 1189.7
  Top Layer w7.87: v1(3919.29,2820.87) 3934.79,2836.36 4068.5,2836.36 4068.63,2836.49 4111.89,2836.49 4117.92,2842.52 4124.02,2842.52 4340.55,3059.06 v1(4561.02,3059.06)
  Bottom Layer w7.87: R13.2 3683.29,2845.25 R14.1 3896.65,2843.5 v1(3919.29,2820.87) ; U1.11 4561.02,2968.5 v1(4561.02,3059.06)
RXM: R13.1 U2.1 | length 169.3
  Bottom Layer w7.87: U2.1 3449.56,2853.35 3518.7,2853.35 3529.53,2842.52 3529.53,2808.07 3541.34,2796.26 R13.1
TX: U1.12 U2.4 | length 1631.3
  Top Layer w7.87: v1(3866.49,2611.57) 3866.49,2817.28 3901.45,2852.24 3952.63,2852.24 3952.76,2852.36 4105.31,2852.36 4341.54,3088.58 4593.42,3088.58 4605.23,3076.77 v1(4608.27,3076.77)
  Bottom Layer w7.87: U2.4 3723.62,2703.54 3815.6,2611.57 v1(3866.49,2611.57) ; U1.12 4608.07,3076.57 v1(4608.27,3076.77)
WIFI_RXD: J1.4 U1.34 | length 1733.2
  Top Layer w7.87: v1(4251.97,3542.32) 4251.97,3574.8 4211.61,3615.16 4211.61,3942.3 4330.34,4061.02 5186.02,4061.02 5206.69,4081.69 5206.69,4140.35 J1.4
  Bottom Layer w7.87: v1(4251.97,3542.32) 4258.07,3548.43 U1.34
WIFI_TXD: J1.2 U1.35 | length 1605.8
  Top Layer w7.87: v1(4195.87,3535.43) 4181.1,3550.2 4181.1,3955.71 4353.47,4128.08 4813.12,4128.08 4857.28,4172.24 5100.39,4172.24 5119.14,4153.49 5119.14,4127.9 J1.2
  Bottom Layer w7.87: v1(4195.87,3535.43) 4208.07,3547.64 U1.35
pads on no net: BS1.5 BS1.6 BS1.7 BS1.8 BS1.11 U1.4 U1.5 U1.6 U1.7 U1.17 U1.18 U1.19 U1.20 U1.21 U1.22 U1.24 U1.26 U1.29 U1.32
copper on no net:
  other v1: 2910.43,2738.19 2907.48,3460.63 3330.71,4246.06

## Polygon pours and split planes (outlines as drawn)
GND on Bottom Layer "NONET_L-01_P-001" (hatched 45Degree grid 30 track 8, remove dead copper, pour order 1): 5367.13,4480.31 2860.24,4480.31 2612.2,4232.28 2611.22,4232.28 2611.22,1721.47 2610.14,1720.38 5083.7,1720.38 5083.7,1721.41 5367.47,2005.19
GND on Top Layer "NONET_L-01_P-001" (hatched 45Degree grid 30 track 8, remove dead copper, pour order 0): 5367.13,4480.31 5366.14,4481.3 2864.17,4481.3 2864.17,4480.31 2614.17,4230.31 2614.18,4230.3 2614.18,1718.52 5080.7,1718.52 5080.71,1718.5 5369.09,2006.89 5369.09,2012.8

## Keep-outs
Keep-Out Layer:
  lines w3.94: 2608.27,1716.54 5081.69,1716.54 5370.08,2004.92 5370.08,4482.28 ; 2612.2,1717.52 2612.2,4235.24 2860.24,4483.27 5375,4483.27
  lines w10: 3763.19,2945.87 4011.22,2945.87 4011.22,3654.53 3763.19,3654.53 3763.19,2945.87

## Other copper
Top Layer:
  rectangle net +5V: 2931.1,3970.47 3026.57,4018.7
  rectangle net +5V: 3216.54,4008.86 3336.61,4048.23
  pour cut-out: 2816.93,2989.17 2815.94,2988.19 2714.57,2988.19 2714.57,3187.99 2816.93,3187.99
  pour cut-out: 5090.55,4027.56 2892.72,4027.56 2880.91,4015.75 2880.91,2099.41 5069.88,2099.41 5075.79,2105.32
  pour cut-out: 4854.33,3099.41 4218.5,3099.41 4217.52,3100.39 4217.52,3929.13 4852.36,3929.13
  pour cut-out: 4858.27,2136.81 4848.43,2146.65 4848.43,2978.35 4218.5,2978.35 4220.47,2976.38 4220.47,2134.84
  pour cut-out: 3125.98,2980.32 3751.97,2980.32 3754.92,2977.36 3754.92,2137.8 3123.03,2137.8 3122.05,2138.78
  pour cut-out: 3125,3924.21 3126.97,3926.18 3752.95,3926.18 3752.95,3101.38 3753.94,3100.39 3124.02,3100.39
Bottom Layer:
  rectangle net +5V: 2931.1,3971.46 3026.57,4016.73
  rectangle net +5V: 3215.55,4005.91 3340.55,4053.15

## Silkscreen, mask and mechanical layers (free items; w line width, h text height)
Top Overlay:
  lines w3.94: 3124.02,2134.84 3124.02,4063.98 ; 3203.74,3917.32 3203.74,3838.58 3636.81,3838.58 3636.81,3917.32 ; 3230.31,2163.39 3230.31,2242.13 3663.39,2242.13 3663.39,2163.39 ; 4312.99,3919.29 4312.99,3840.55 4746.06,3840.55 4746.06,3919.29 ; 4335.63,2157.48 4335.63,2236.22 4768.7,2236.22 4768.7,2157.48 ; 4856.3,2134.84 4856.3,4063.98 ; 3124.02,2154.53 3753.94,2154.53 3753.94,2981.3 3124.02,2981.3 3124.02,2154.53 ; 3124.02,3099.41 3753.94,3099.41 3753.94,3926.18 3124.02,3926.18 3124.02,3099.41 ; 4218.5,2154.53 4848.43,2154.53 4848.43,2981.3 4218.5,2981.3 4218.5,2154.53 ; 4218.5,3099.41 4218.5,3926.18 4848.43,3926.18 4848.43,3099.41 4218.5,3099.41
  lines w5.12: 2969.49,4064.96 2967.52,4062.99 2967.52,2135.83 5013.31,2135.83
  lines w10: 2969.49,4064.96 3041.34,4064.96 ; 3163.39,4062.01 3812.01,4062.01 ; 4181.1,4064.96 5013.78,4064.96 5013.78,3394.69 ; 5013.31,2135.83 5013.31,2799.68
  lines w11.81: 3176.18,3158.46 3176.18,3827.76 3687.99,3827.76 3687.99,3158.46 3176.18,3158.46 ; 3179.13,2252.95 3179.13,2922.24 3690.94,2922.24 3690.94,2252.95 3179.13,2252.95 ; 4284.45,2247.05 4796.26,2247.05 4796.26,2916.34 4284.45,2916.34 4284.45,2247.05 ; 4285.43,3160.43 4797.24,3160.43 4797.24,3829.72 4285.43,3829.72 4285.43,3160.43
Bottom Overlay:
  lines w10: 3295.28,4157.48 3295.28,4290.35 ; 3553.15,2323.82 3553.15,2369.09
V Cut:
  lines w3.94: 2610,1719.09 3987.95,1719.09 ; 2610,3100 3987.95,3100 ; 2610.24,1720.47 2610.24,3098.43 ; 2610.24,3101.38 2610.24,4479.33 ; 2611.06,4481.46 3989.02,4481.46 ; 3990,3099.53 3990,1719.49 5367.95,1719.49 ; 3990,3100 5367.95,3100 ; 3990,3105 3990,4480.31 5370,4480.31 5370,4384.84 ; 5370,1721.06 5370,3099.02 ; 5370,3101.97 5370,4479.92
Fab Notes:
  rectangle: 2612.2,2968.86 2966.54,3243.6
  rectangle: 3899.61,4480.31 4039.37,4559.06
  lines w10: 2610.3,3234.82 cw(c2809.12,3230.88) 2971.66,3345.44 ; 2612.2,3234.25 2612.2,2977.36 ccw(c2810.96,2970.89) 2969.19,2850.45 ; 2927.17,3868.11 2967.52,3868.11 ; 2936.02,2661.42 2966.54,2661.42 ; 2939.96,3580.71 2965.55,3580.71 ; 2940.94,2267.72 2967.52,2267.72 ; 5013.78,3869.09 5038.39,3869.09 ; 5015.75,2267.72 5056.1,2267.72 ; 5015.75,2677.17 5045.28,2677.17 ; 5015.75,3580.71 5043.31,3580.71
  text "15" at 5992.13,2371.06 h60
Mechanical 15:
  lines w10: 2969.49,4060.04 2972.44,4060.04 ; 3989.17,3970.47 3989.17,4062.01 ; 3989.57,3100 3990,3100

## Dimensions
5170.28,2770.67 to 5517.72,2291.34 on V Cut
2818.9,3425.2 to 1940.94,3858.27 on V Cut
2968.5,2122.05 to 5174.21,1774.61 on V Cut
2967.52,4064.96 to 2691.93,4066.93 on V Cut
4316.93,4269.69 to 3662.4,4316.93 on V Cut
2967.52,4064.96 to 2325.79,4482.28 on V Cut
2303.15,1715.55 to 2312.99,3103.35 on V Cut
2610.24,1686.02 to 5371.06,1591.54 on V Cut
2610.24,4479.33 to 2610,1719.09 on V Cut

## Text inside footprints (layer, text, board x,y; h text height)
J1: Bottom Overlay "6" at 5108.94,4378.11 h45 r270; Bottom Overlay "5" at 5008.94,4378.11 h45 r270; Bottom Overlay "2" at 5108.94,4018.11 h45 r270; Bottom Overlay "1" at 5008.94,4038.11 h45 r270
U1: Mechanical 13 "ANTENNA" at 3910.83,3063.98 h35 r90